# EAGLE board ME461_F28379DHeaders (EAGLE 7.7.0)

No outline drawn. Coordinates in mm, seen from the top.
Copper layers (1*16): Top 0.035mm / dielectric 1.5mm / Bottom 0.035mm
Design rules "default *": minimum track width 7mil, minimum drill 20mil, track to track 8mil, track to pad 8mil, pad to pad 8mil, via to via 8mil, smd to smd 8mil, copper to edge 40mil, drill to drill 8mil, minimum pad ring 10mil, minimum via ring 8mil, stop-mask expansion 4mil, vias tented up to drill 20mil, thermal gap 10mil
Net classes: 0 default: width 0.203 mm, drill 0.508 mm, clearance 0.203 mm; 1 supply: width 0.61 mm, drill 0.508 mm, clearance 0.203 mm

## Footprints (pad centres in the part's own frame; a part is rotated, then mirrored left to right if it is on the bottom)
STRIP3 = drill 1.016 octagon: P$1 0,0; P$2 2.54,0; P$3 5.08,0
STRIP2 = drill 1.016 octagon: P$1 0,0; P$2 2.54,0
F28379D_LAUNCHPAD = drill 1.016 square: P$1 -24.13,33.02; P$11 21.59,10.16; P$21 -21.59,33.02; P$31 19.05,10.16; P$41 -24.13,-30.48; P$51 21.59,-53.34; P$61 -21.59,-30.48; P$71 19.05,-53.34 | drill 1.016 octagon: P$2 -24.13,30.48; P$3 -24.13,27.94; P$4 -24.13,25.4; P$5 -24.13,22.86; P$6 -24.13,20.32; P$7 -24.13,17.78; P$8 -24.13,15.24; P$9 -24.13,12.7; P$10 -24.13,10.16; P$12 21.59,12.7; P$13 21.59,15.24; P$14 21.59,17.78; P$15 21.59,20.32; P$16 21.59,22.86; P$17 21.59,25.4; P$18 21.59,27.94; P$19 21.59,30.48; P$20 21.59,33.02; P$22 -21.59,30.48; P$23 -21.59,27.94; P$24 -21.59,25.4; P$25 -21.59,22.86; P$26 -21.59,20.32; P$27 -21.59,17.78; P$28 -21.59,15.24; P$29 -21.59,12.7; P$30 -21.59,10.16; P$32 19.05,12.7; P$33 19.05,15.24; P$34 19.05,17.78; P$35 19.05,20.32; P$36 19.05,22.86; P$37 19.05,25.4; P$38 19.05,27.94; P$39 19.05,30.48; P$40 19.05,33.02; P$42 -24.13,-33.02; P$43 -24.13,-35.56; P$44 -24.13,-38.1; P$45 -24.13,-40.64; P$46 -24.13,-43.18; P$47 -24.13,-45.72; P$48 -24.13,-48.26; P$49 -24.13,-50.8; P$50 -24.13,-53.34; P$52 21.59,-50.8; P$53 21.59,-48.26; P$54 21.59,-45.72; P$55 21.59,-43.18; P$56 21.59,-40.64; P$57 21.59,-38.1; P$58 21.59,-35.56; P$59 21.59,-33.02; P$60 21.59,-30.48; P$62 -21.59,-33.02; P$63 -21.59,-35.56; P$64 -21.59,-38.1; P$65 -21.59,-40.64; P$66 -21.59,-43.18; P$67 -21.59,-45.72; P$68 -21.59,-48.26; P$69 -21.59,-50.8; P$70 -21.59,-53.34; P$72 19.05,-50.8; P$73 19.05,-48.26; P$74 19.05,-45.72; P$75 19.05,-43.18; P$76 19.05,-40.64; P$77 19.05,-38.1; P$78 19.05,-35.56; P$79 19.05,-33.02; P$80 19.05,-30.48
CASTERWHEEL = hole 3.175: 19.685,0; -19.685,0

## Placement (x,y rotation side)
J10  STRIP3  [STRIP3]  39.37,165.74 0 top
J11  STRIP2  [STRIP2]  64.77,178.44 0 top
J12  STRIP2  [STRIP2]  64.77,175.9 0 top
J13  STRIP2  [STRIP2]  64.77,173.35 0 top
J14  STRIP3  [STRIP3]  39.37,163.19 0 top
J15  STRIP3  [STRIP3]  39.37,160.66 0 top
J16  STRIP3  [STRIP3]  39.37,158.12 0 top
J17  STRIP3  [STRIP3]  39.37,155.57 0 top
J18  STRIP3  [STRIP3]  39.37,153.03 0 top
J19  STRIP3  [STRIP3]  39.37,150.5 0 top
J20  STRIP3  [STRIP3]  39.37,147.96 0 top
J21  STRIP3  [STRIP3]  39.37,145.41 0 top
J22  STRIP2  [STRIP2]  64.77,170.81 0 top
J25  STRIP2  [STRIP2]  64.77,168.28 0 top
J26  STRIP2  [STRIP2]  64.77,180.97 0 top
J27  STRIP2  [STRIP2]  67.94,133.35 0 top
J28  STRIP3  [STRIP3]  39.37,142.88 0 top
J29  STRIP3  [STRIP3]  95.25,142.88 0 top
J30  STRIP3  [STRIP3]  95.25,145.41 0 top
J31  STRIP3  [STRIP3]  95.25,147.96 0 top
J32  STRIP3  [STRIP3]  95.25,150.5 0 top
J33  STRIP3  [STRIP3]  95.25,153.03 0 top
J34  STRIP2  [STRIP2]  67.94,130.81 0 top
J62  STRIP2  [STRIP2]  67.94,107.95 0 top
J63  STRIP2  [STRIP2]  62.87,107.95 0 top
J98  STRIP3  [STRIP3]  95.25,155.57 0 top
J99  STRIP3  [STRIP3]  95.25,158.12 0 top
J100  STRIP3  [STRIP3]  95.25,160.66 0 top
J101  STRIP3  [STRIP3]  95.25,163.19 0 top
J102  STRIP3  [STRIP3]  95.25,165.74 0 top
J103  STRIP3  [STRIP3]  52.07,165.74 0 top
J104  STRIP3  [STRIP3]  52.07,163.19 0 top
J105  STRIP3  [STRIP3]  52.07,160.66 0 top
J106  STRIP3  [STRIP3]  52.07,158.12 0 top
J107  STRIP3  [STRIP3]  52.07,155.57 0 top
J108  STRIP3  [STRIP3]  52.07,153.03 0 top
J109  STRIP3  [STRIP3]  52.07,150.5 0 top
J110  STRIP3  [STRIP3]  52.07,147.96 0 top
J111  STRIP3  [STRIP3]  52.07,145.41 0 top
J112  STRIP3  [STRIP3]  52.07,142.88 0 top
J113  STRIP3  [STRIP3]  82.55,142.88 0 top
J114  STRIP3  [STRIP3]  82.55,145.41 0 top
J115  STRIP3  [STRIP3]  82.55,147.96 0 top
J116  STRIP3  [STRIP3]  82.55,150.5 0 top
J117  STRIP3  [STRIP3]  82.55,153.03 0 top
J118  STRIP3  [STRIP3]  82.55,155.57 0 top
J119  STRIP3  [STRIP3]  82.55,158.12 0 top
J120  STRIP3  [STRIP3]  82.55,160.66 0 top
J121  STRIP3  [STRIP3]  82.55,163.19 0 top
J122  STRIP3  [STRIP3]  82.55,165.74 0 top
J133  STRIP3  [STRIP3]  82.55,102.23 0 top
J134  STRIP3  [STRIP3]  82.55,99.69 0 top
J135  STRIP3  [STRIP3]  82.55,97.16 0 top
J136  STRIP3  [STRIP3]  82.55,94.61 0 top
J137  STRIP3  [STRIP3]  82.55,92.08 0 top
J138  STRIP3  [STRIP3]  82.55,89.53 0 top
J139  STRIP3  [STRIP3]  82.55,87 0 top
J140  STRIP3  [STRIP3]  82.55,84.45 0 top
J141  STRIP3  [STRIP3]  82.55,81.92 0 top
J142  STRIP3  [STRIP3]  82.55,79.38 0 top
J143  STRIP3  [STRIP3]  52.07,79.38 0 top
J144  STRIP3  [STRIP3]  52.07,81.92 0 top
J145  STRIP3  [STRIP3]  52.07,84.45 0 top
J146  STRIP3  [STRIP3]  52.07,87 0 top
J147  STRIP3  [STRIP3]  52.07,89.53 0 top
J148  STRIP3  [STRIP3]  52.07,92.08 0 top
J149  STRIP3  [STRIP3]  52.07,94.61 0 top
J150  STRIP3  [STRIP3]  52.07,97.16 0 top
J151  STRIP3  [STRIP3]  52.07,99.69 0 top
J152  STRIP3  [STRIP3]  52.07,102.23 0 top
J153  STRIP3  [STRIP3]  95.25,102.23 0 top
J154  STRIP3  [STRIP3]  95.25,99.69 0 top
J155  STRIP3  [STRIP3]  95.25,97.16 0 top
J156  STRIP3  [STRIP3]  95.25,94.61 0 top
J157  STRIP3  [STRIP3]  95.25,92.08 0 top
J158  STRIP3  [STRIP3]  95.25,89.53 0 top
J159  STRIP3  [STRIP3]  95.25,87 0 top
J160  STRIP3  [STRIP3]  95.25,84.45 0 top
J161  STRIP3  [STRIP3]  95.25,81.92 0 top
J162  STRIP3  [STRIP3]  95.25,79.38 0 top
J163  STRIP3  [STRIP3]  39.37,79.38 0 top
J164  STRIP3  [STRIP3]  39.37,81.92 0 top
J165  STRIP3  [STRIP3]  39.37,84.45 0 top
J166  STRIP3  [STRIP3]  39.37,87 0 top
J167  STRIP3  [STRIP3]  39.37,89.53 0 top
J168  STRIP3  [STRIP3]  39.37,92.08 0 top
J169  STRIP3  [STRIP3]  39.37,94.61 0 top
J170  STRIP3  [STRIP3]  39.37,97.16 0 top
J176  STRIP3  [STRIP3]  39.37,99.69 0 top
J177  STRIP3  [STRIP3]  39.37,102.23 0 top
J178  STRIP2  [STRIP2]  64.77,196.22 0 top
J179  STRIP2  [STRIP2]  64.77,193.68 0 top
J180  STRIP2  [STRIP2]  64.77,191.13 0 top
J182  STRIP2  [STRIP2]  64.77,188.59 0 top
J183  STRIP2  [STRIP2]  64.77,186.06 0 top
J184  STRIP2  [STRIP2]  64.77,183.51 0 top
J186  STRIP2  [STRIP2]  67.94,128.27 0 top
J187  STRIP2  [STRIP2]  67.94,125.73 0 top
J188  STRIP2  [STRIP2]  67.94,123.19 0 top
J189  STRIP2  [STRIP2]  67.94,135.89 0 top
J190  STRIP2  [STRIP2]  67.94,118.11 0 top
J191  STRIP2  [STRIP2]  67.94,115.57 0 top
J192  STRIP2  [STRIP2]  67.94,113.03 0 top
J193  STRIP2  [STRIP2]  67.94,110.49 0 top
J194  STRIP2  [STRIP2]  67.94,105.41 0 top
J195  STRIP2  [STRIP2]  67.94,120.65 0 top
J210  STRIP2  [STRIP2]  59.69,196.22 0 top
J211  STRIP2  [STRIP2]  59.69,193.68 0 top
J232  STRIP2  [STRIP2]  59.69,191.13 0 top
J233  STRIP2  [STRIP2]  59.69,188.59 0 top
J234  STRIP2  [STRIP2]  59.69,183.51 0 top
J235  STRIP2  [STRIP2]  59.69,180.97 0 top
J236  STRIP2  [STRIP2]  59.69,178.44 0 top
J237  STRIP2  [STRIP2]  59.69,175.9 0 top
J238  STRIP2  [STRIP2]  59.69,173.35 0 top
J239  STRIP2  [STRIP2]  59.69,170.81 0 top
J240  STRIP2  [STRIP2]  59.69,168.28 0 top
J241  STRIP2  [STRIP2]  59.69,186.06 0 top
J242  STRIP2  [STRIP2]  62.87,135.89 0 top
J243  STRIP2  [STRIP2]  62.87,133.35 0 top
J244  STRIP2  [STRIP2]  62.87,130.81 0 top
J245  STRIP2  [STRIP2]  62.87,128.27 0 top
J246  STRIP2  [STRIP2]  62.87,125.73 0 top
J247  STRIP2  [STRIP2]  62.87,123.19 0 top
J248  STRIP2  [STRIP2]  62.87,120.65 0 top
J249  STRIP2  [STRIP2]  62.87,118.11 0 top
J250  STRIP2  [STRIP2]  62.87,115.57 0 top
J251  STRIP2  [STRIP2]  62.87,105.41 0 top
J252  STRIP2  [STRIP2]  62.87,113.03 0 top
J253  STRIP2  [STRIP2]  62.87,110.49 0 top
L1  F28379D_LAUNCHPAD  [F28379D_LAUNCHPAD]  71.12,132.72 0 top
U$4  CASTERWHEEL  [CASTERWHEEL]  73.03,174.62 90 top

## Library data of the parts
J10-J22 J25-J34 J62 J63 J98-J122 J133-J170 J176-J180 J182-J184 J186-J195 J210 J211 J232-J253 = strip
L1 U$4 = SE423EagleLibrary

## Nets
+5V [supply]: J103.P$1 J103.P$2 J103.P$3 J152.P$1 J152.P$2 J152.P$3 L1.P$21 L1.P$61
ADCIN14: J105.P$1 J105.P$2 J105.P$3 L1.P$23
ADCIN15: J150.P$1 J150.P$2 J150.P$3 L1.P$63
ADCINA2: J111.P$1 J111.P$2 J111.P$3 L1.P$29
ADCINA3: J108.P$1 J108.P$2 J108.P$3 L1.P$26
ADCINA4: J144.P$1 J144.P$2 J144.P$3 L1.P$69
ADCINA5: J147.P$1 J147.P$2 J147.P$3 L1.P$66
ADCINB2: J110.P$1 J110.P$2 J110.P$3 L1.P$28
ADCINB3: J107.P$1 J107.P$2 J107.P$3 L1.P$25
ADCINB4: J145.P$1 J145.P$2 J145.P$3 L1.P$68
ADCINB5: J148.P$1 J148.P$2 J148.P$3 L1.P$65
ADCINC2: J109.P$1 J109.P$2 J109.P$3 L1.P$27
ADCINC3: J106.P$1 J106.P$2 J106.P$3 L1.P$24
ADCINC4: J146.P$1 J146.P$2 J146.P$3 L1.P$67
ADCINC5: J149.P$1 J149.P$2 J149.P$3 L1.P$64
DAC1: J114.P$1 J114.P$2 J114.P$3 L1.P$32
DAC2: J113.P$1 J113.P$2 J113.P$3 L1.P$31
DAC3: J141.P$1 J141.P$2 J141.P$3 J252.P$1 J252.P$2 L1.P$72
DAC4: J142.P$1 J142.P$2 J142.P$3 J253.P$1 J253.P$2 L1.P$71
DACOUTA: J112.P$1 J112.P$2 J112.P$3 L1.P$30
DACOUTB: J143.P$1 J143.P$2 J143.P$3 L1.P$70
GND [supply]: J102.P$1 J102.P$2 J102.P$3 L1.P$20
GPIO0: J122.P$1 J122.P$2 J122.P$3 L1.P$40
GPIO1: J121.P$1 J121.P$2 J121.P$3 L1.P$39
GPIO2: J120.P$1 J120.P$2 J120.P$3 L1.P$38
GPIO3: J119.P$1 J119.P$2 J119.P$3 L1.P$37
GPIO4: J118.P$1 J118.P$2 J118.P$3 L1.P$36
GPIO5: J117.P$1 J117.P$2 J117.P$3 L1.P$35
GPIO6: J133.P$1 J133.P$2 J133.P$3 L1.P$80
GPIO7: J134.P$1 J134.P$2 J134.P$3 J242.P$1 J242.P$2 L1.P$79
GPIO8: J135.P$1 J135.P$2 J135.P$3 J243.P$1 J243.P$2 L1.P$78
GPIO9: J136.P$1 J136.P$2 J136.P$3 J244.P$1 J244.P$2 L1.P$77
GPIO10: J137.P$1 J137.P$2 J137.P$3 L1.P$76
GPIO11: J138.P$1 J138.P$2 J138.P$3 L1.P$75
GPIO14: J139.P$1 J139.P$2 J139.P$3 L1.P$74
GPIO15: J140.P$1 J140.P$2 J140.P$3 L1.P$73
GPIO16: J115.P$1 J115.P$2 J115.P$3 J251.P$1 J251.P$2 L1.P$33
GPIO18: J16.P$1 J16.P$2 J16.P$3 L1.P$4
GPIO19: J15.P$1 J15.P$2 J15.P$3 L1.P$3
GPIO22: J20.P$1 J20.P$2 J20.P$3 L1.P$8
GPIO24: J116.P$1 J116.P$2 J116.P$3 J245.P$1 J245.P$2 L1.P$34
GPIO25: J162.P$1 J162.P$2 J162.P$3 J246.P$1 J246.P$2 L1.P$51
GPIO26: J160.P$1 J160.P$2 J160.P$3 J247.P$1 J247.P$2 L1.P$53
GPIO27: J161.P$1 J161.P$2 J161.P$3 J248.P$1 J248.P$2 L1.P$52
GPIO29: J29.P$1 J29.P$2 J29.P$3 L1.P$11
GPIO32: J14.P$1 J14.P$2 J14.P$3 L1.P$2
GPIO40: J163.P$1 J163.P$2 J163.P$3 L1.P$50
GPIO41: J164.P$1 J164.P$2 J164.P$3 L1.P$49
GPIO52: J165.P$1 J165.P$2 J165.P$3 J211.P$1 J211.P$2 L1.P$48
GPIO56: J169.P$1 J169.P$2 J169.P$3 L1.P$44
GPIO58: J33.P$1 J33.P$2 J33.P$3 L1.P$15
GPIO59: J32.P$1 J32.P$2 J32.P$3 L1.P$14
GPIO60: J19.P$1 J19.P$2 J19.P$3 L1.P$7
GPIO61: J101.P$1 J101.P$2 J101.P$3 J250.P$1 J250.P$2 L1.P$19
GPIO63: J158.P$1 J158.P$2 J158.P$3 L1.P$55
GPIO64: J159.P$1 J159.P$2 J159.P$3 L1.P$54
GPIO65: J166.P$1 J166.P$2 J166.P$3 L1.P$47
GPIO66: J154.P$1 J154.P$2 J154.P$3 L1.P$59
GPIO67: J17.P$1 J17.P$2 J17.P$3 L1.P$5
GPIO94: J167.P$1 J167.P$2 J167.P$3 J233.P$1 J233.P$2 L1.P$46
GPIO95: J176.P$1 J176.P$2 J176.P$3 J241.P$1 J241.P$2 L1.P$42
GPIO97: J168.P$1 J168.P$2 J168.P$3 J234.P$1 J234.P$2 L1.P$45
GPIO104: J28.P$1 J28.P$2 J28.P$3 L1.P$10
GPIO105: J21.P$1 J21.P$2 J21.P$3 L1.P$9
GPIO111: J18.P$1 J18.P$2 J18.P$3 L1.P$6
GPIO122: J99.P$1 J99.P$2 J99.P$3 L1.P$17
GPIO123: J100.P$1 J100.P$2 J100.P$3 L1.P$18
GPIO124: J31.P$1 J31.P$2 J31.P$3 L1.P$13
GPIO125: J30.P$1 J30.P$2 J30.P$3 L1.P$12
GPIO130: J156.P$1 J156.P$2 J156.P$3 L1.P$57
GPIO131: J155.P$1 J155.P$2 J155.P$3 L1.P$58
GPIO139: J170.P$1 J170.P$2 J170.P$3 L1.P$43
N$47: J62.P$1 J62.P$2
N$52: J63.P$1 J63.P$2
N$156: J26.P$1 J26.P$2
N$159: J11.P$1 J11.P$2
N$163: J12.P$1 J12.P$2
N$343: J178.P$1 J178.P$2
N$346: J179.P$1 J179.P$2
N$349: J180.P$1 J180.P$2
N$352: J182.P$1 J182.P$2
N$355: J183.P$1 J183.P$2
N$358: J184.P$1 J184.P$2
N$362: J13.P$1 J13.P$2
N$365: J22.P$1 J22.P$2
N$368: J25.P$1 J25.P$2
N$371: J189.P$1 J189.P$2
N$374: J27.P$1 J27.P$2
N$377: J34.P$1 J34.P$2
N$380: J186.P$1 J186.P$2
N$383: J187.P$1 J187.P$2
N$386: J188.P$1 J188.P$2
N$389: J195.P$1 J195.P$2
N$392: J190.P$1 J190.P$2
N$395: J191.P$1 J191.P$2
N$398: J192.P$1 J192.P$2
N$401: J193.P$1 J193.P$2
N$404: J194.P$1 J194.P$2
RESET: J98.P$1 J98.P$2 J98.P$3 L1.P$16
RESET_2: J157.P$1 J157.P$2 J157.P$3 L1.P$56
S$1 [supply]: J104.P$1 J104.P$2 J104.P$3 L1.P$22
S$2: J237.P$1 J237.P$2
S$3 [supply]: J177.P$1 J177.P$2 J177.P$3 L1.P$41
S$4: J236.P$1 J236.P$2
S$5 [supply]: J151.P$1 J151.P$2 J151.P$3 J153.P$1 J153.P$2 J153.P$3 L1.P$60 L1.P$62
S$6: J240.P$1 J240.P$2
S$7: J239.P$1 J239.P$2
S$8: J238.P$1 J238.P$2
S$9: J232.P$1 J232.P$2
S$10: J210.P$1 J210.P$2
S$11: J235.P$1 J235.P$2
S$12: J249.P$1 J249.P$2
VCC [supply]: J10.P$1 J10.P$2 J10.P$3 L1.P$1

## Tracks (layer width: path | path; a pad name or v marks a point on that pad's centre or on a via)
+5V  (7 unrouted)
ADCIN14  (3 unrouted)
ADCIN15  (3 unrouted)
ADCINA2  (3 unrouted)
ADCINA3  (3 unrouted)
ADCINA4  (3 unrouted)
ADCINA5  (3 unrouted)
ADCINB2  (3 unrouted)
ADCINB3  (3 unrouted)
ADCINB4  (3 unrouted)
ADCINB5  (3 unrouted)
ADCINC2  (3 unrouted)
ADCINC3  (3 unrouted)
ADCINC4  (3 unrouted)
ADCINC5  (3 unrouted)
DAC1  (3 unrouted)
DAC2  (3 unrouted)
DAC3  (5 unrouted)
DAC4  (5 unrouted)
DACOUTA  (3 unrouted)
DACOUTB  (3 unrouted)
GND  (3 unrouted)
GPIO0  (3 unrouted)
GPIO1  (3 unrouted)
GPIO2  (3 unrouted)
GPIO3  (3 unrouted)
GPIO4  (3 unrouted)
GPIO5  (3 unrouted)
GPIO6  (3 unrouted)
GPIO7  (5 unrouted)
GPIO8  (5 unrouted)
GPIO9  (5 unrouted)
GPIO10  (3 unrouted)
GPIO11  (3 unrouted)
GPIO14  (3 unrouted)
GPIO15  (3 unrouted)
GPIO16  (5 unrouted)
GPIO18  (3 unrouted)
GPIO19  (3 unrouted)
GPIO22  (3 unrouted)
GPIO24  (5 unrouted)
GPIO25  (5 unrouted)
GPIO26  (5 unrouted)
GPIO27  (5 unrouted)
GPIO29  (3 unrouted)
GPIO32  (3 unrouted)
GPIO40  (3 unrouted)
GPIO41  (3 unrouted)
GPIO52  (5 unrouted)
GPIO56  (3 unrouted)
GPIO58  (3 unrouted)
GPIO59  (3 unrouted)
GPIO60  (3 unrouted)
GPIO61  (5 unrouted)
GPIO63  (3 unrouted)
GPIO64  (3 unrouted)
GPIO65  (3 unrouted)
GPIO66  (3 unrouted)
GPIO67  (3 unrouted)
GPIO94  (5 unrouted)
GPIO95  (5 unrouted)
GPIO97  (5 unrouted)
GPIO104  (3 unrouted)
GPIO105  (3 unrouted)
GPIO111  (3 unrouted)
GPIO122  (3 unrouted)
GPIO123  (3 unrouted)
GPIO124  (3 unrouted)
GPIO125  (3 unrouted)
GPIO130  (3 unrouted)
GPIO131  (3 unrouted)
GPIO139  (3 unrouted)
N$47  (1 unrouted)
N$52  (1 unrouted)
N$156  (1 unrouted)
N$159  (1 unrouted)
N$163  (1 unrouted)
N$343  (1 unrouted)
N$346  (1 unrouted)
N$349  (1 unrouted)
N$352  (1 unrouted)
N$355  (1 unrouted)
N$358  (1 unrouted)
N$362  (1 unrouted)
N$365  (1 unrouted)
N$368  (1 unrouted)
N$371  (1 unrouted)
N$374  (1 unrouted)
N$377  (1 unrouted)
N$380  (1 unrouted)
N$383  (1 unrouted)
N$386  (1 unrouted)
N$389  (1 unrouted)
N$392  (1 unrouted)
N$395  (1 unrouted)
N$398  (1 unrouted)
N$401  (1 unrouted)
N$404  (1 unrouted)
RESET  (3 unrouted)
RESET_2  (3 unrouted)
S$1  (3 unrouted)
S$2  (1 unrouted)
S$3  (3 unrouted)
S$4  (1 unrouted)
S$5  (7 unrouted)
S$6  (1 unrouted)
S$7  (1 unrouted)
S$8  (1 unrouted)
S$9  (1 unrouted)
S$10  (1 unrouted)
S$11  (1 unrouted)
S$12  (1 unrouted)
TR_LOAD  (1 unrouted)
VCC  (3 unrouted)

## Text on the board
tPlace: GPIO22 | LED1 | GPIO52 | LED2 | GPIO67 | LED3 | GPIO94 | LED4 | GPIO95 | LED5 | GPIO97 | LED6 | GPIO111 | LED7 | ME461 Default Pin Assignments for / the LaunchPad's I/O and ADC pins. / Please note that you can change / these assignments as needed in / your designs/programs. | GPIO130 | LED8 | GPIO131 | LED9 | GPIO4 | LED10 | GPIO5 | LED11 | GPIO6 | LED12 | 3.3V | 5V | GPIO0 | GND | DRV2DIR/GPIO32 | GND | GPIO1 | GPIO61/LED21 | SPISTEA/GPIO19 | A14 | GPIO2 | GPIO123/SWITCH2 | SPICLKA/GPIO18 | AC3 | GPIO3 | GPIO122/SWITCH1 | LED3/GPIO67 | AB3 | LED10/GPIO4 | RESET | LED7/GPIO111 | AA3 | LED11/GPIO5 | GPIO58/SPISIMOA | LED20/GPIO60 | AC2 | LED16/GPIO24 | GPIO59/SPISOMIA | PWM_LED1/GPIO22 | AB2 | BUZR/GPIO16 | GPIO124/SWITCH3 | GPIO125/SWITCH4 | SCLA/SCIRXDD/GPIO105 | AA2 | GPIO159 | SDAA/SCITXDD/GPIO104 | DACA | GPIO160 | GPIO29/DRV1DIR | GPIO7 | LED13 | GPIO8 | LED14 | GPIO9 | LED15 | GPIO24 | LED16 | GPIO25 | LED17 | GPIO26 | LED18 | GPIO27 | LED19 | GPIO60 | LED20 | GPIO61 | LED21 | GPIO157/DAC3 | LED22 | GPIO158/DAC4 | LED23 | NOT CONNECTED | LED24 | GPIO16 | BUZZER | 3.3V | 5V | LED12/GPIO6 | GND | LED5/GPIO95 | GND | LED13/GPIO7 | GPIO66/SPISTEB | SCIRXDC/GPIO139 | A15 | LED14/GPIO8 | GPIO131/LED9 | SCITXDC/GPIO56 | AC5 | LED15/GPIO9 | GPIO130/LED8 | LED6/GPIO97 | AB5 | DRV1PWM/10 | RESET | LED4/GPIO94 | AA5 | DRV2PWM/11 | GPIO63/SPISIMOB | SPICLKB/GPIO65 | AC4 | RCSERVO1/14 | GPIO64/SPISOMIB | LED2/GPIO52 | AB4 | RCSERVO2/15 | GPIO26/LED18 | SCLB/GPIO41 | AA4 | LED22/157 | GPIO27/LED19 | DACB | GPIO25/LED17 | SDAB/GPIO40 | LED23/158